# Altium PCB MMA8452QT.PcbDoc
Units mm, origin at the board's own origin, x right, y up, seen from the top; angles counter-clockwise.
Board outline 127 x 101.6 mm, 2 copper layers (Top Layer, Bottom Layer); 8 components, 9 nets, 34 pads, 0 vias.
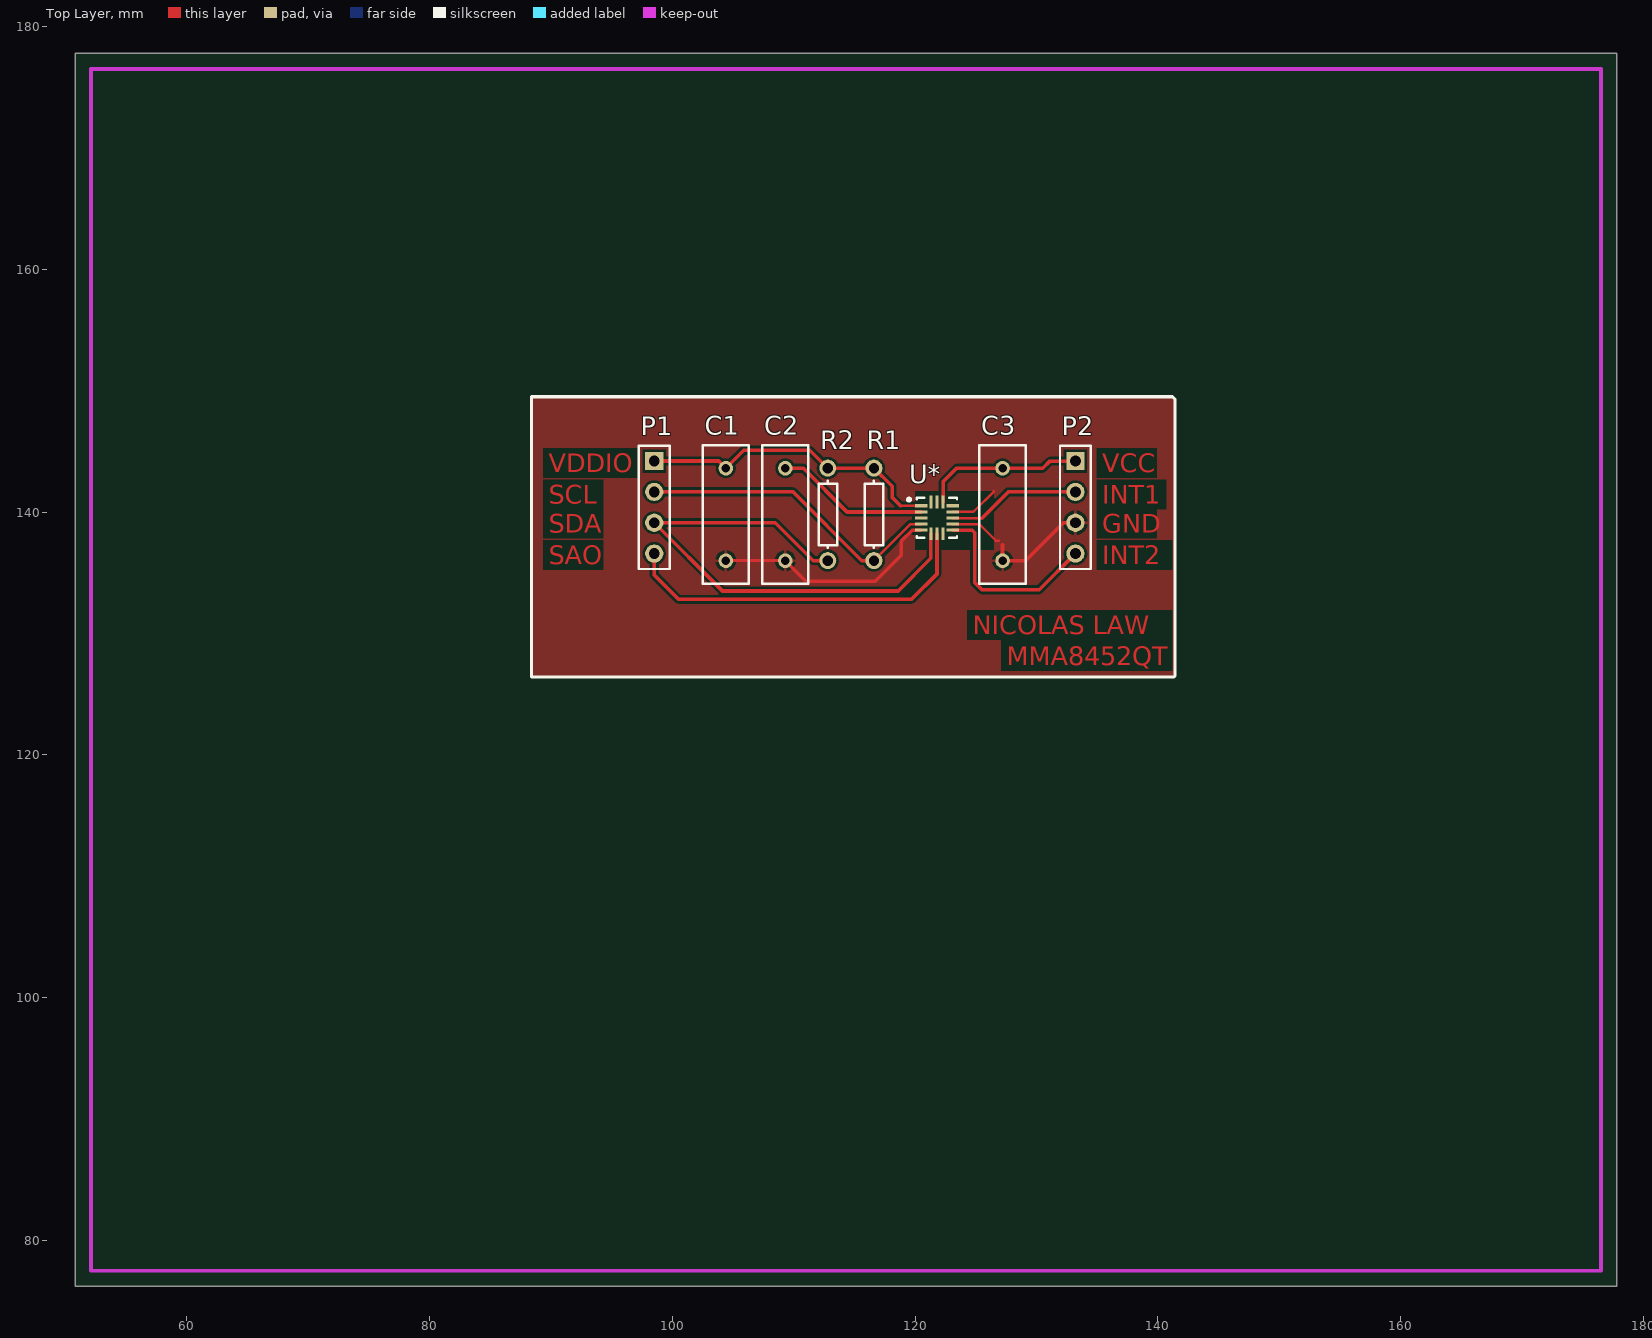
[diagram p0: Top Layer view]
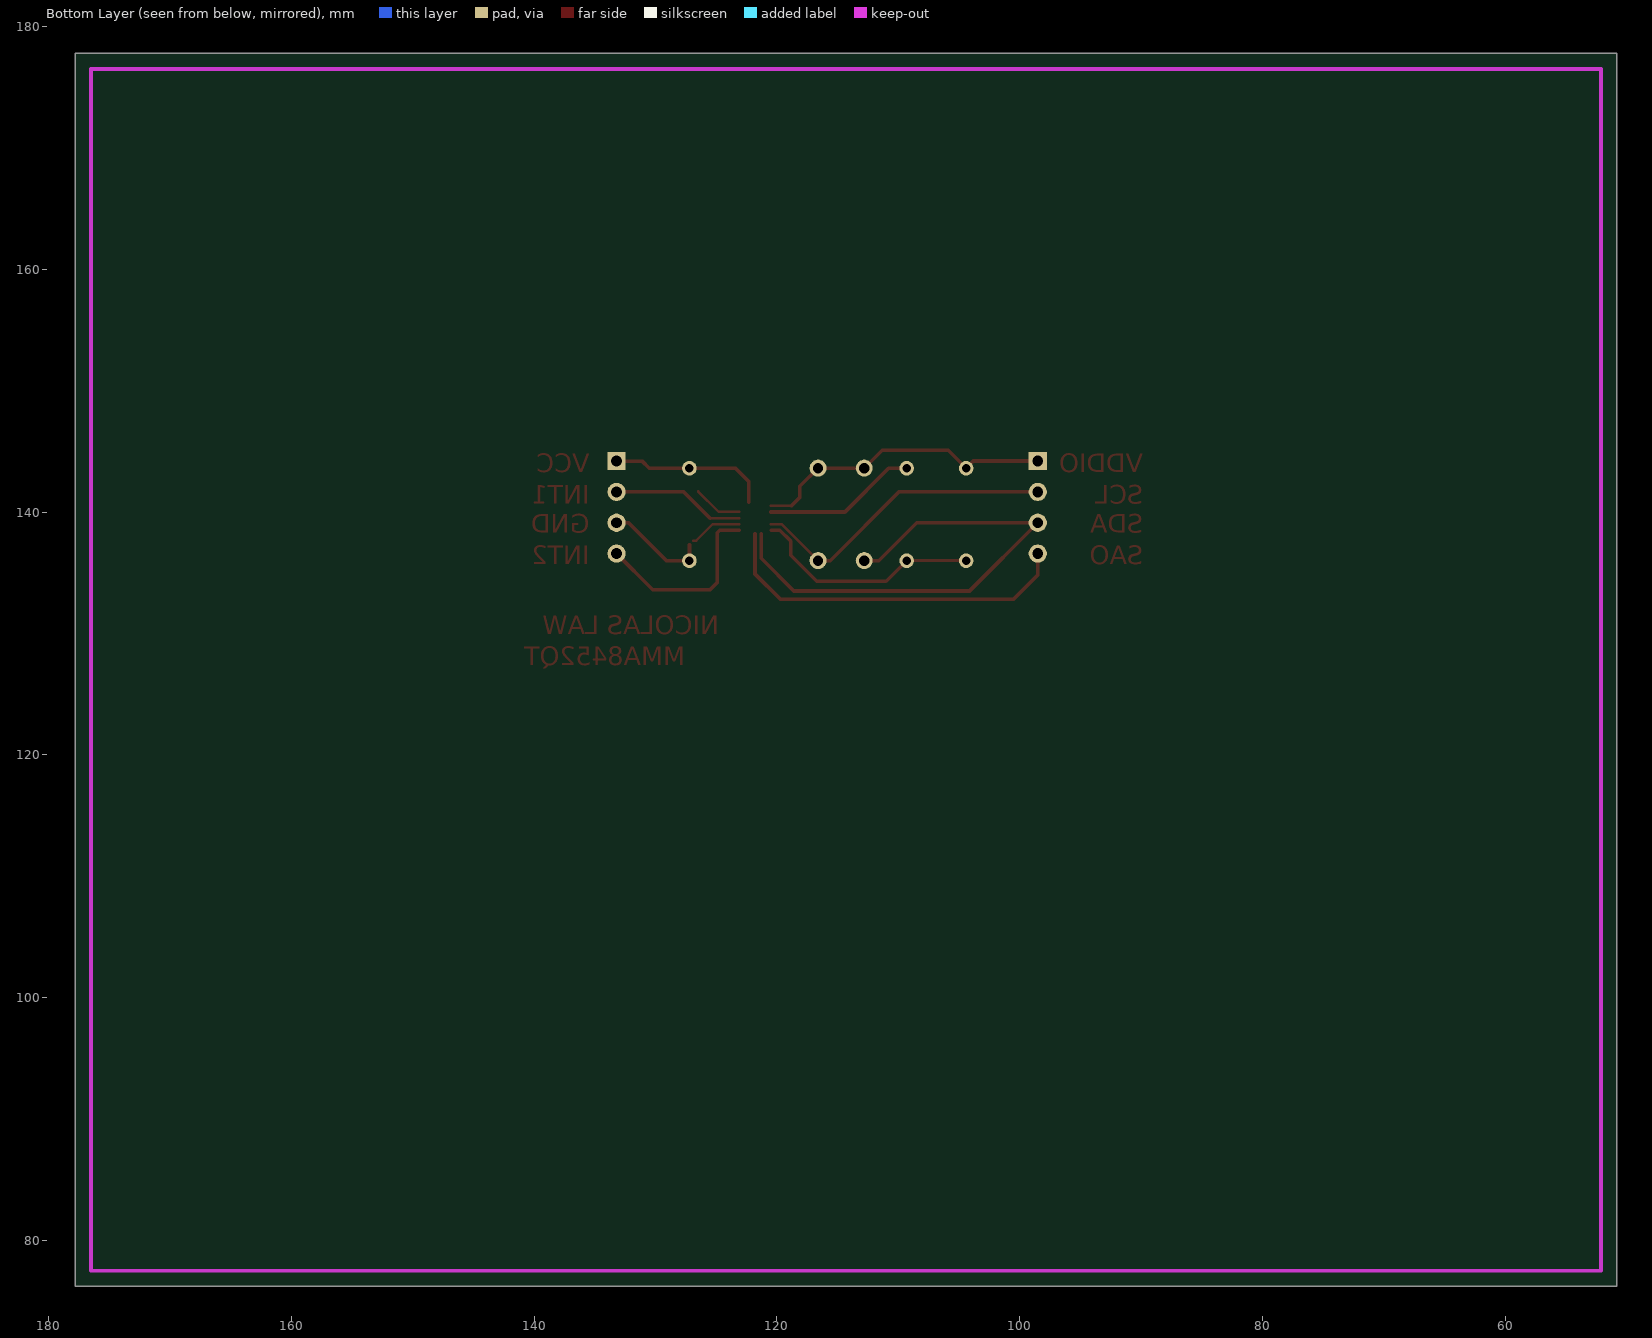
[diagram p1: Bottom Layer view, seen from below]

## Layer stack, top to bottom
Top Solder: solder mask 0.0102, Solder Resist, Dk 3.5
Top Layer: signal copper 0.0356
Dielectric 1: dielectric 0.32, FR-4, Dk 4.8
Bottom Layer: signal copper 0.0356
Bottom Solder: solder mask 0.0102, Solder Resist, Dk 3.5

## Board outline
50.8,76.2 177.8,76.2 177.8,177.8 50.8,177.8

## Design rules (kind name [scope] priority, off if disabled: settings)
Clearance Clearance_plan [InPolygon] p1: gap=0.2
Clearance [All] p2: gap=0.2
PolygonConnect [All] p1: connectstyle=Relief reliefconductorwidth=0.254 reliefentries=4 polygonreliefangle="90 Angle" airgapwidth=0.254
RoutingVias [All] p1: holewidth=0.8 width=1.6 viastyle="Through Hole" minholewidth=0.711 minwidth=1.27 maxholewidth=0.711 maxwidth=1.27
SolderMaskExpansion [All] p1: expansion=0.102
UnpouredPolygon [All] p1: allowunpoured=FALSE
Width [All] p1: maxlimit=2.54 minlimit=0.2 preferedwidth=0.3 minimp=50.000000 maximp=50.000000 favimp=50.000000
29 further rules are at their usual default settings.

## Components (designator, comment, footprint, x,y, rotation, side; value= is the part's Value field where it differs from the comment)
C1 "Cap" RAD-0.3 104.4,139.8 r90 top
C2 "Cap" RAD-0.3 109.3,139.8 r90 top
C3 "Cap" RAD-0.3 127.2,139.8 r90 top
P1 "Header 4" HDR1X4 98.5,144.2 r270 top
P2 "Header 4" HDR1X4 133.2,144.2 r270 top
R1 "Res1" AXIAL-0.3 116.6,139.81 r90 top
R2 "Res1" AXIAL-0.3 112.8,139.81 r90 top
U* "MMA8452QT" MMA8452QT 121.793,139.522 r0 top

## Footprints (in the part's own frame and the unit in brackets; to place one, negate y for a bottom-side part, rotate by r counter-clockwise, add the part's x,y. Pads: shape width x height; smd on the part's side, far side on the other; paste and mask are expansions set on the pad)
AXIAL-0.3 [mm] "Axial Device, Thru-Hole; 2 Leads; 0.3 in Pin Spacing"
  round 1.4 hole 0.85: 1(-3.81,0) 2(3.81,0)
  silkscreen extent -2.77,-0.76 2.77,0.76
HDR1X4 [mm] "Connector; Header; 4 Position"
  rect 1.5x1.5 hole 0.9: 1(0,0)
  round 1.5 hole 0.9: 2(2.54,0) 3(5.08,0) 4(7.62,0)
  silkscreen extent -1.27,-1.27 8.89,1.27
MMA8452QT [mm] "QFN, 16-Leads, Body 3,00x3,00mm, Pitch 0,50mm, Thermal Pad 0,00x1,15mm, IPC Medium Density"
  rect 1.05x0.25 smd: 1(-1.3,1) 2(-1.3,0.5) 3(-1.3,0) 4(-1.3,-0.5) 5(-1.3,-1) 9(1.3,-1) 10(1.3,-0.5) 11(1.3,0) 12(1.3,0.5) 13(1.3,1)
  rect 0.25x1.05 smd: 6(-0.5,-1.3) 7(0,-1.3) 8(0.5,-1.3) 14(0.5,1.3) 15(0,1.3) 16(-0.5,1.3)
  silkscreen extent -2.42,-1.65 1.65,1.65, body extent -1.5,-1.5 1.5,1.5, height 1
RAD-0.3 [mm] "Radial Cap, Thru-Hole; 2 Leads; 0.3 in Pin Spacing"
  round 1.2 hole 0.7: 1(-3.81,0) 2(3.81,0)
  silkscreen extent -5.71,-1.91 5.71,1.91

## Part data
C1 C2 C3: "Capacitor"
P1 P2: "Header, 4-Pin"
R1 R2: "Resistor"

## Nets (pads, with @x,y where several pads share a name; then routed paths per layer and width w, separated by ;. In a path a pad name is that pad's centre, name@x,y a point inside that pad or via, vN(x,y) a via of type N, cw(c..) or ccw(c..) an arc to the next point about the centre after c; other vN are vias at no path point)
BYP: C2.2 U*.2 | length 12.7
  Top Layer w0.3: C2.2 110.79,143.61 114.39,140.01 U*.2@120.493,140.01
GND: C1.1 C2.1 C3.1 P2.3 U*.5 U*.10 U*.12 | length 36.3
  Top Layer w0.2: U*.10@123.081,139.01 125.277,139.01 126.644,137.643 126.898,137.643 ; U*.12 124.807,140.022 126.491,141.706
  Top Layer w0.254: C1.1@104.4,136 109.29,136 C2.1 110.99,134.3 116.715,134.3
  Top Layer w0.3: 116.715,134.3 118.862,136.447 118.862,137.608 119.755,138.5 U*.5@120.471,138.5 ; 127.2,137.3 C3.1 129.09,135.99 132.22,139.12 P2.3
INT1: P2.2 U*.11 | length 11
  Top Layer w0.2: U*.11@123.093,139.497 125.497,139.497
  Top Layer w0.3: 125.497,139.497 127.66,141.66 P2.2
INT2: P2.4 U*.9 | length 15.8
  Top Layer w0.254: U*.9@123.068,138.497 123.093,138.497 U*.9@123.096,138.5
  Top Layer w0.3: U*.9@123.096,138.5 124.7,138.5 124.9,138.3 124.9,134.2 125.5,133.6 130.22,133.6 P2.4
SAO: P1.4 U*.7 | length 30.1
  Top Layer w0.3: P1.4@98.5,136.59 98.5,134.81 100.5,132.81 119.7,132.81 121.793,134.903 U*.7
SCL: P1.2 R1.1 U*.4 | length 25.6
  Top Layer w0.2: R1.1 119.61,139.01 U*.4@120.493,139.01
  Top Layer w0.3: P1.2@98.5,141.67 109.93,141.67 115.6,136 R1.1
SDA: P1.3 R2.1 U*.6 | length 43.9
  Top Layer w0.3: R2.1 111.6,136 108.47,139.13 98.5,139.13 104.13,133.5 118.6,133.5 121.293,136.193 U*.6
VCC: C3.2 P2.1 U*.14 | length 13.3
  Top Layer w0.3: U*.14@122.3,140.822 122.3,142.5 123.41,143.61 C3.2 130.51,143.61 131.1,144.2 P2.1
VDDIO: C1.2 P1.1 R1.2 R2.2 U*.1 | length 25.3
  Top Layer w0.2: 118.79,140.51 U*.1@120.493,140.51
  Top Layer w0.3: P1.1@98.5,144.21 103.81,144.21 104.4,143.62 105.88,145.1 111.32,145.1 R2.2 R1.2 118.1,142.12 118.1,141.2 118.79,140.51
pads on no net: U*.3 U*.8 U*.13 U*.15 U*.16

## Polygon pours and split planes (outlines as drawn)
GND on Top Layer "Top Layer-No Net" (solid, remove dead copper, pour order 2): 88.4,149.5 88.4,126.4 88.5,126.5 141.4,126.5 141.4,149.3 141.2,149.5 88.4,149.5

## Keep-outs
Keep-Out Layer:
  lines w0.3: 52.1,77.5 176.5,77.5 176.5,176.5 52.1,176.5 52.1,77.5

## Other copper
Top Layer:
  pour cut-out: 119.991,141.706 126.491,141.706 126.491,136.906 119.991,136.906
  text "VDDIO" at 89.8,143.3 h1.52
  text "VCC" at 135.4,143.3 h1.52
  text "SCL" at 89.8,140.7 h1.52
  text "INT1" at 135.4,140.7 h1.52
  text "SDA" at 89.8,138.3 h1.52
  text "GND" at 135.4,138.3 h1.52
  text "SAO" at 89.8,135.7 h1.52
  text "INT2" at 135.4,135.7 h1.52
  text "NICOLAS LAW" at 124.735,129.938 h1.52
  text "MMA8452QT" at 127.529,127.398 h1.52

## Silkscreen, mask and mechanical layers (free items; w line width, h text height)
Top Overlay:
  lines w0.254: 88.4,126.4 141.3,126.4 141.4,126.5 141.4,149.3 141.2,149.5 88.4,149.5 88.4,127 88.4,126.4
Mechanical 1:
  the board outline again, w1.2

## Dimensions
52.1,77.5 to 176.5,77.5 on Mechanical 1
52.1,77.5 to 52.1,176.5 on Mechanical 1